# Altium PCB main.PcbDoc (part 2 of 2)
Units mm, origin at the board's own origin, x right, y up, seen from the top; angles counter-clockwise.
Board outline 136 x 119 mm, 2 copper layers (Top Layer, Bottom Layer); 167 components, 134 nets, 513 pads, 251 vias.
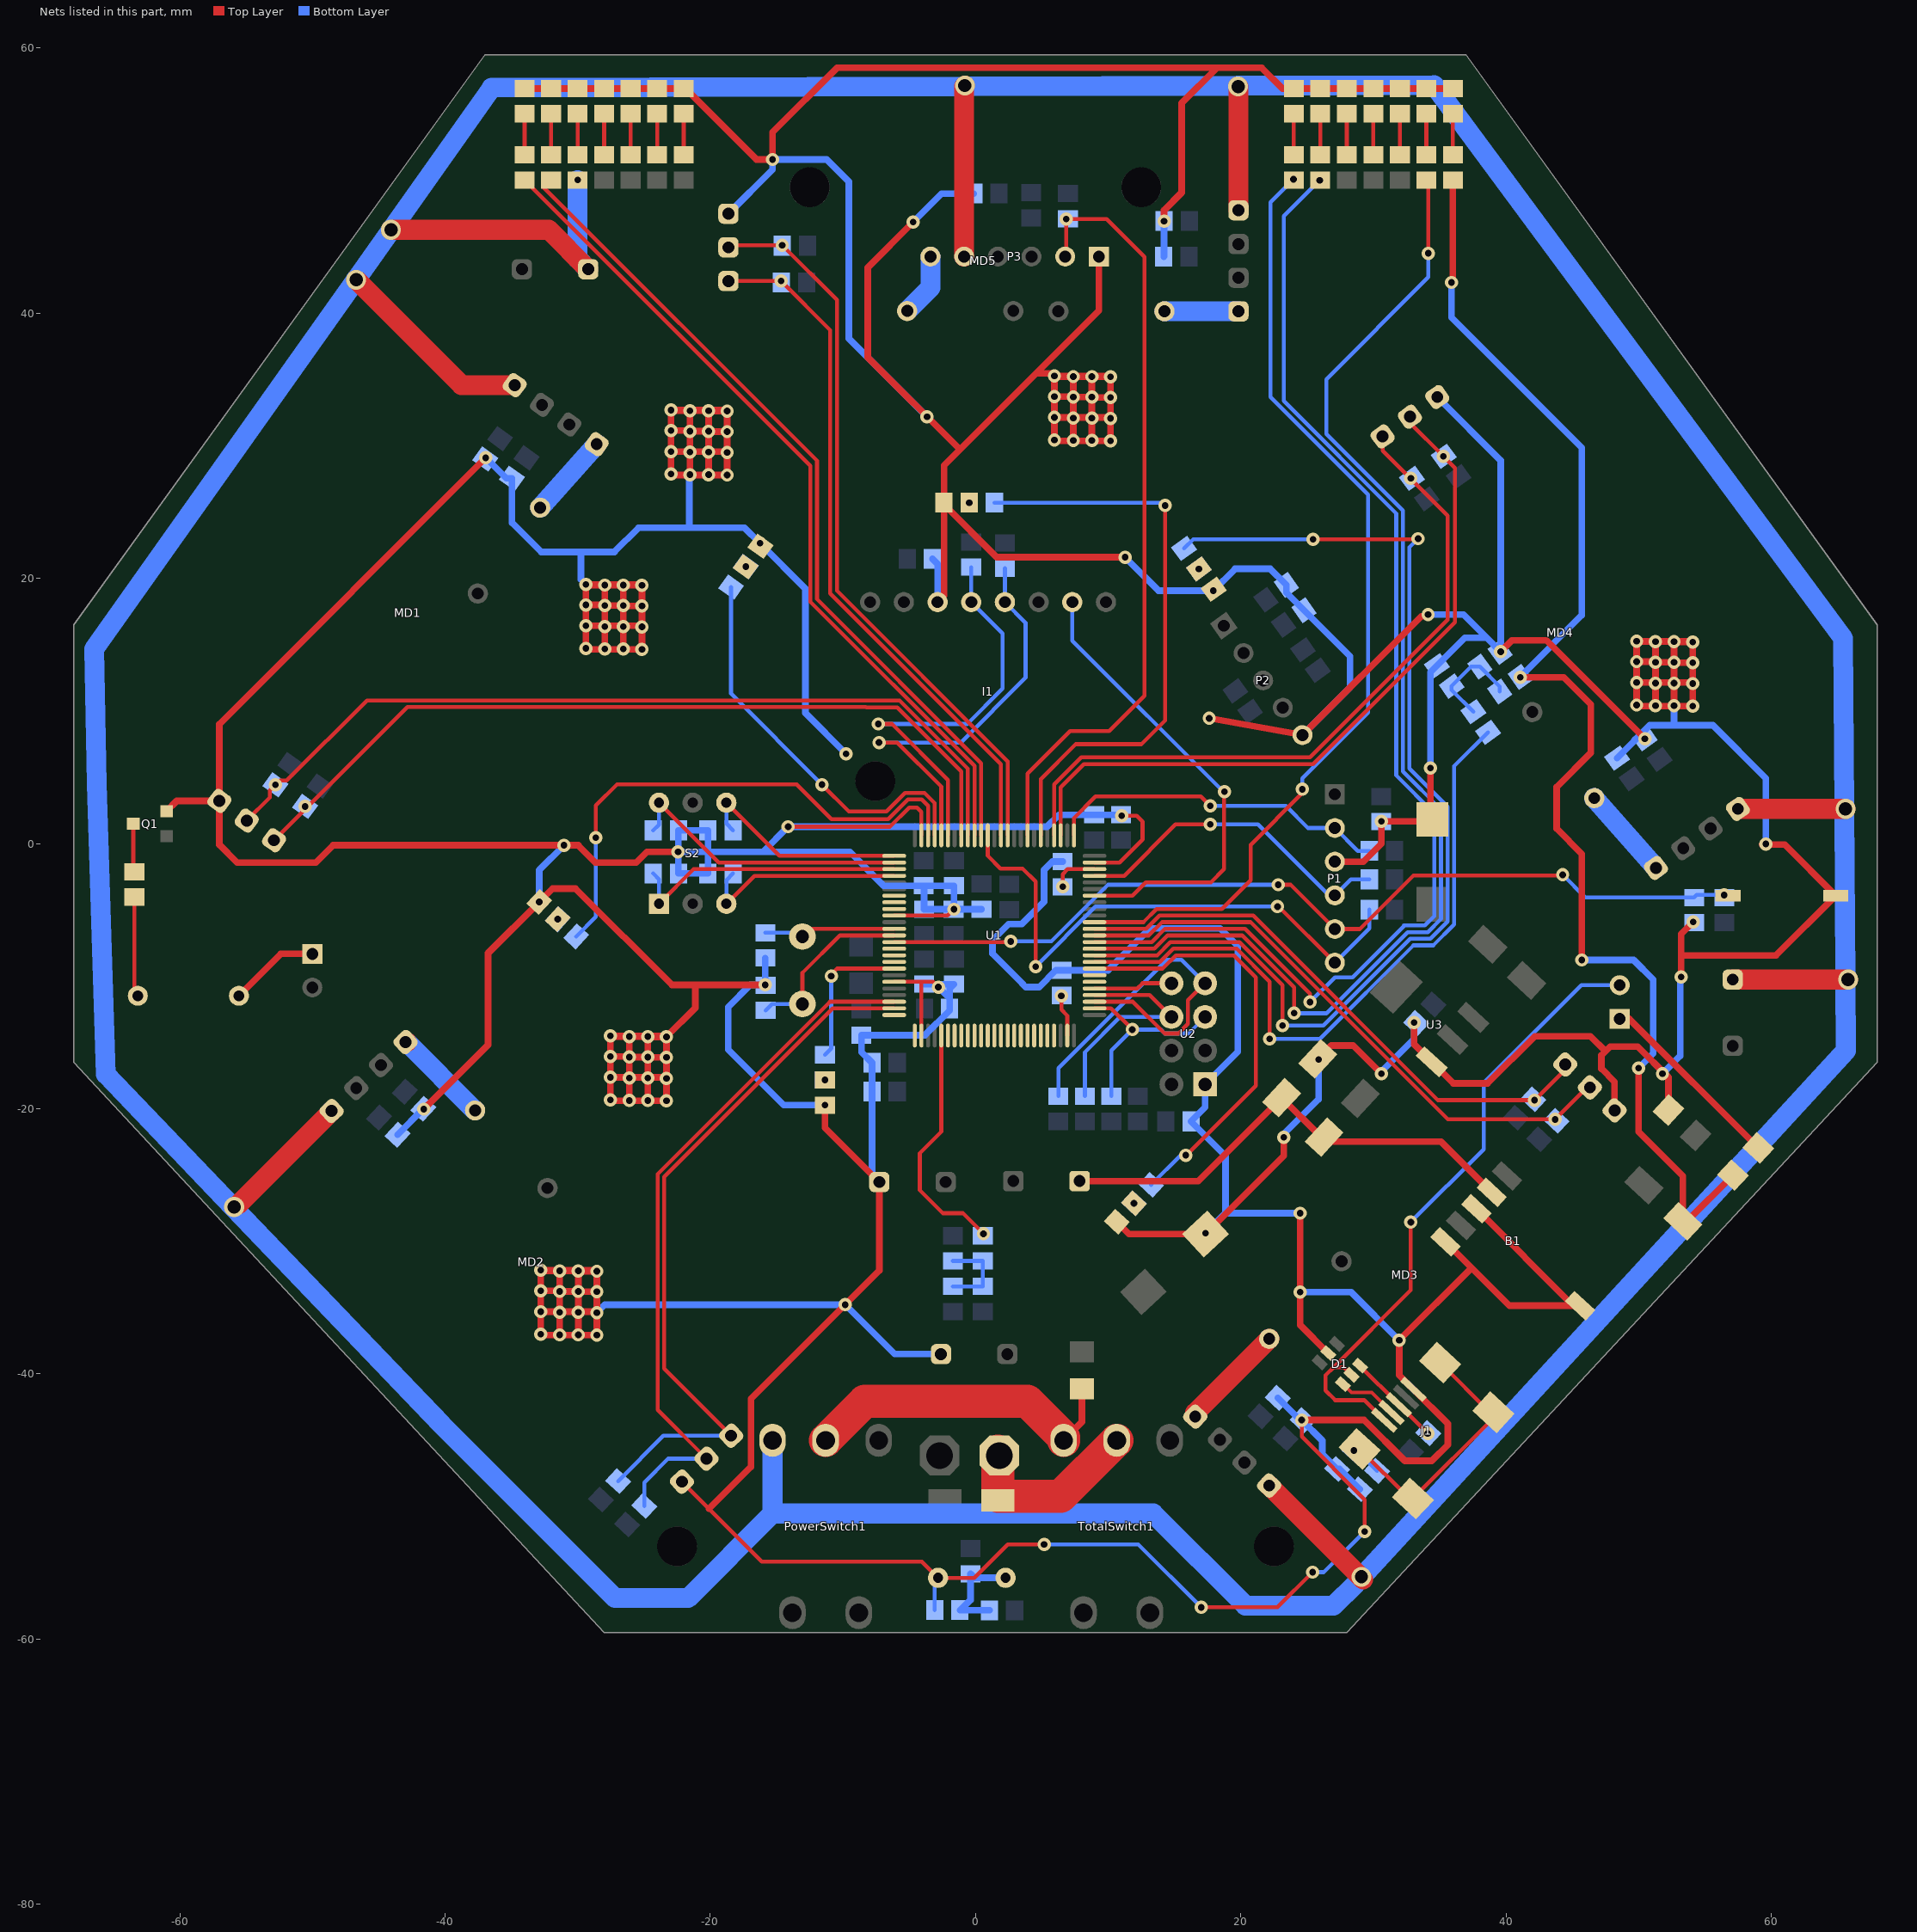
[diagram p2: the nets of this part, all layers, seen from the top]

## Via types
v1: diameter 1, hole 0.5, Top Layer to Bottom Layer, 242 vias
v2: diameter 1.5, hole 1, Top Layer to Bottom Layer, 9 vias

## Nets (pads, with @x,y where several pads share a name; then routed paths per layer and width w, separated by ;. In a path a pad name is that pad's centre, name@x,y a point inside that pad or via, vN(x,y) a via of type N, cw(c..) or ccw(c..) an arc to the next point about the centre after c; other vN are vias at no path point) (continued)
GND: B1.3 B1.5 B1.6 C1.1 C2.1 C3.1 C4.1 C5.1 C6.1 C7.1 C8.1 C9.1 C10.1 C11.1 C12.1 C13.1 C14.1 C15.1 C17.1 C18.2 C19.2 C20.1 C21.1 C22.1 C24.1 C25.1 C26.1 C27.1 C29.1 C31.1 C32.1 C33.1 C34.1 C35.1 C36.1 C37.1 C38.1 C39.- C40.- C42.2 C43.1 C44.2 C46.1 C47.1 D1.2 D5.1 D7.2 D8.2 D9.2 D10.2 FB2.1 I1.2 J1.5 LED1.2 LED2.2 LED3.2 LED4.2 LED5.2 LED6.2 LED7.2 LED8.2 LED9.2 LED10.2 LED11.2 LED12.2 LED13.2 LED14.2 LED15.2 LED16.2 MD1.6 MD2.6 MD3.6 MD4.6 MD5.6 P1.3 P2.5 P3.1 Q1.3 R4.2 R7.1 R8.1 R9.1 R10.1 R21.2 R22.1 S1.2 S3.2 U1.10 U1.20 U1.27 U1.74 U1.99 U2.1 U3.1 | length 1296.1
  Top Layer w0.3: MD2.6@-22.137,-48.12 -20.091,-50.166 -16.107,-54.15 -4.04,-54.15 S3.2@-2.815,-55.375 -0.1,-55.375 2.425,-52.85 v1(5.175,-52.85) ; v1(-14.125,1.275) -6.443,1.275 -4.993,2.725 -4.4,2.725 -4.075,2.4 U1.99@-4.075,0.625 ; U1.20@-6.125,-10.425 -4.075,-10.425 ; U1.10@-6.125,-5.425 -2.1,-5.425 v1(-1.625,-4.95) ; U1.27@-4.075,-14.475 -4.075,-10.425 ; v1(-2.8,-10.825) -3.2,-10.425 -4.075,-10.425 ; U1.74@8.975,-1.425 10.85,-1.425 12.6,0.325 12.6,1.65 12.15,2.1 v1(11.025,2.1) ; v1(17.025,-57.6) 22.775,-57.6 v1(25.425,-54.95) ; v1(24.6,-43.475) 24.6,-44.725 29.35,-49.475 v1(29.35,-51.875)
  Top Layer w0.5: Q1.3@-61,2.45 -60.228,3.222 MD1.6@-57.013,3.222 ; v1@-41.7,-20.125 v1(-41.6,-20.025) -36.75,-15.175 -36.75,-8.257 v1(-32.895,-4.402) -31.893,-3.4 -30.15,-3.4 -22.9,-10.65 -21.125,-10.65 ; v1(-36.925,29.1) -57.013,9.012 MD1.6@-57.013,3.222 ; LED11.2@-34,56.95 LED10.2@-32,56.95 D10.2@-30,56.95 LED2.2@-28,56.95 LED1.2@-26,56.95 LED8.2@-24,56.95 LED9.2@-22,56.95 -21.864,56.95 -16.514,51.6 v1(-15.3,51.6) -15.3,53.65 -10.425,58.525 18.225,58.525 ; v1(-22.425,-0.625) -24.775,-0.625 -25.575,-1.425 -28.65,-1.425 -29.95,-0.125 v1(-31.025,-0.125) -48.45,-0.125 -49.75,-1.425 -55.675,-1.425 -57.013,-0.087 MD1.6@-57.013,3.222 ; -20.091,-50.166 -16.925,-47 -16.925,-41.875 v1(-9.825,-34.775) -7.25,-32.2 C40.-@-7.25,-25.525 -11.35,-21.425 v1(-11.35,-19.725) ; v1(-15.85,-10.65) -21.125,-10.65 ; v1(-4.7,46.875) -8.125,43.45 -8.125,36.675 -1.175,29.725 ; I1.2@-2.86,18.215 -2.374,18.701 LED16.2@-2.374,25.578 ; P3.1@9.305,44.275 9.305,40.205 4.575,35.475 ; LED14.2@10.654,-28.515 11.582,-29.443 C42.2@17.34,-29.443 23.25,-23.533 v1(23.25,-22.15) ; v1(11.275,21.6) 1.604,21.6 LED16.2@-2.374,25.578 ; v1(14.225,46.95) 14.225,47.775 15.55,49.1 15.55,55.85 18.225,58.525 ; v1(17.625,9.45) P2.5@24.659,8.189 33.62,17.15 v1@34.3,17.15 ; v1(24.475,-27.875) v1(24.475,-33.825) 24.475,-36.307 D1.2@26.595,-38.427 ; v1(24.6,-43.475) 29.3,-43.475 32.375,-46.55 34.4,-46.55 35.625,-45.325 35.625,-43.764 J1.5@33.016,-41.155 31.95,-40.089 v1(31.95,-37.45) 37.4,-32 37.416,-32 ; D5.1@25.814,-16.237 26.826,-15.225 28.475,-15.225 v1(30.6,-17.35) ; P1.3@27.1,-1.36 29.24,-1.36 30.6,0 v1(30.6,1.675) C44.2@34.3,1.675 ; v1(33.075,-13.5) 33.075,-15.133 U3.1@34.402,-16.46 36.017,-18.075 38.625,-18.075 42.175,-14.525 46.375,-14.525 47.5,-15.65 ; v1(34.3,5.7) C44.2@34.3,1.675 ; C44.2@34.45,1.825 C44.2@34.3,1.675 ; B1.5@35.448,-30.032 37.416,-32 ; LED4.2@36,56.95 LED7.2@34,56.95 D9.2@32,56.95 D8.2@30,56.95 D7.2@28,56.95 LED5.2@26,56.95 LED6.2@24,56.95 23.15,56.95 21.575,58.525 18.225,58.525 ; B1.3@37.767,-27.546 B1.6@45.071,-34.85 ; v1(39.6,14.475) 40.45,15.325 43.05,15.325 v1(50.475,7.9) ; B1.6@45.6,-34.85 B1.6@45.071,-34.85 ; MD3.6@48.189,-20.12 48.189,-17.964 47.2,-16.975 47.2,-15.95 47.5,-15.65 ; FB2.1@52.251,-20.095 52.251,-17.626 49.925,-15.3 47.85,-15.3 47.5,-15.65 ; v1(53.2,-10.05) 53.2,-8.437 ; v1(54.125,-5.9) 53.2,-6.825 53.2,-8.437 ; v1@59.325,-0.075 61.014,-0.075 S1.2@64.864,-3.925 60.352,-8.437 53.2,-8.437 ; v1(-32.775,-35.3) v1(-32.775,-33.725) ; v1(-32.775,-35.3) v1(-32.775,-37) -32.7,-37.075 v1@-31.15,-37.075 ; v1(-32.775,-35.3) v1@-31.35,-35.3 ; v1(-32.775,-33.725) -31.4,-33.725 v1(-31.35,-33.775) ; v1(-32.775,-33.725) v1@-32.775,-32.275 ; v1@-32.775,-32.275 v1@-32.725,-32.225 ; v1@-32.775,-32.275 v1(-32.775,-32.175) ; v1(-32.775,-32.175) -28.625,-32.175 v1(-28.55,-32.25) ; v1(-32.775,-32.175) v1@-32.725,-32.225 ; v1@-32.725,-32.225 v1(-31.35,-32.225) ; v1@-31.35,-35.3 v1(-31.35,-33.775) ; v1@-31.35,-35.3 v1(-31.35,-35.35) -31.35,-36.875 v1@-31.15,-37.075 ; v1@-31.35,-35.3 v1@-29.95,-35.3 ; v1(-31.35,-33.775) v1(-29.95,-33.775) ; v1(-31.35,-33.775) v1(-31.35,-32.225) ; v1(-31.35,-32.225) v1(-29.95,-32.225) ; v1@-31.15,-37.075 v1@-29.925,-37.075 ; v1@-29.95,-35.3 v1(-29.95,-35.35) v1(-29.95,-37.05) v1@-29.925,-37.075 ; v1@-29.95,-35.3 v1(-29.95,-33.775) ; v1@-29.95,-35.3 -28.625,-35.3 v1(-28.55,-35.375) ; v1(-29.95,-33.775) -29.925,-33.8 v1(-28.55,-33.8) ; v1(-29.95,-33.775) v1(-29.95,-32.225) ; v1(-29.95,-32.225) -29.925,-32.25 v1(-28.55,-32.25) ; v1@-29.925,-37.075 v1(-28.55,-37.075) v1(-28.55,-35.375) ; v1(-29.375,16.425) v1(-29.375,18) ; v1(-29.375,16.425) v1(-29.375,14.725) -29.3,14.65 v1@-27.75,14.65 ; v1(-29.375,16.425) v1@-27.95,16.425 ; v1(-29.375,18) -28,18 v1(-27.95,17.95) ; v1(-29.375,18) v1@-29.375,19.45 ; v1@-29.375,19.45 v1@-29.325,19.5 ; v1@-29.375,19.45 v1(-29.375,19.55) ; v1(-29.375,19.55) -25.225,19.55 v1(-25.15,19.475) ; v1(-29.375,19.55) v1@-29.325,19.5 ; v1@-29.325,19.5 v1(-27.95,19.5) ; v1(-28.55,-35.375) v1(-28.55,-33.8) ; v1(-28.55,-33.8) v1(-28.55,-32.25) ; v1@-27.95,16.425 v1(-27.95,17.95) ; v1@-27.95,16.425 v1(-27.95,16.375) -27.95,14.85 v1@-27.75,14.65 ; v1@-27.95,16.425 v1@-26.55,16.425 ; v1(-27.95,17.95) v1(-26.55,17.95) ; v1(-27.95,17.95) v1(-27.95,19.5) ; v1(-27.95,19.5) v1(-26.55,19.5) ; v1@-27.75,14.65 v1@-26.525,14.65 ; v1(-27.525,-17.625) v1@-26.1,-17.625 ; v1(-27.525,-17.625) v1(-27.525,-19.325) -27.45,-19.4 v1@-25.9,-19.4 ; v1(-27.525,-17.625) v1(-27.525,-16.05) ; v1(-27.525,-16.05) v1@-27.525,-14.6 ; v1(-27.525,-16.05) -26.15,-16.05 v1(-26.1,-16.1) ; v1@-27.525,-14.6 v1(-27.525,-14.5) ; v1@-27.525,-14.6 v1@-27.475,-14.55 ; v1(-27.525,-14.5) -23.375,-14.5 v1(-23.3,-14.575) ; v1(-27.525,-14.5) v1@-27.475,-14.55 ; v1@-27.475,-14.55 v1(-26.1,-14.55) ; v1@-26.55,16.425 v1(-26.55,16.375) v1(-26.55,14.675) v1@-26.525,14.65 ; v1@-26.55,16.425 v1(-26.55,17.95) ; v1@-26.55,16.425 -25.225,16.425 v1(-25.15,16.35) ; v1(-26.55,17.95) -26.525,17.925 v1(-25.15,17.925) ; v1(-26.55,17.95) v1(-26.55,19.5) ; v1(-26.55,19.5) -26.525,19.475 v1(-25.15,19.475) ; v1@-26.525,14.65 v1(-25.15,14.65) v1(-25.15,16.35) ; v1@-26.1,-17.625 v1@-24.7,-17.625 ; v1@-26.1,-17.625 v1(-26.1,-17.675) -26.1,-19.2 v1@-25.9,-19.4 ; v1@-26.1,-17.625 v1(-26.1,-16.1) ; v1(-26.1,-16.1) v1(-26.1,-14.55) ; v1(-26.1,-16.1) v1(-24.7,-16.1) ; v1(-26.1,-14.55) v1(-24.7,-14.55) ; v1@-25.9,-19.4 v1@-24.675,-19.4 ; v1(-25.15,16.35) v1(-25.15,17.925) ; v1(-25.15,17.925) v1(-25.15,19.475) ; v1@-24.7,-17.625 -23.375,-17.625 v1(-23.3,-17.7) ; v1@-24.7,-17.625 v1(-24.7,-16.1) ; v1@-24.7,-17.625 v1(-24.7,-17.675) v1(-24.7,-19.375) v1@-24.675,-19.4 ; v1(-24.7,-16.1) v1(-24.7,-14.55) ; v1(-24.7,-16.1) -24.675,-16.125 v1(-23.3,-16.125) ; v1(-24.7,-14.55) -24.675,-14.575 v1(-23.3,-14.575) ; v1@-24.675,-19.4 v1(-23.3,-19.4) v1(-23.3,-17.7) ; v1(-23.3,-17.7) v1(-23.3,-16.125) ; v1(-23.3,-16.125) v1(-23.3,-14.575) ; v1(-23.3,-14.575) -21.125,-12.4 -21.125,-10.65 ; v1(-22.95,29.575) v1(-22.95,31.15) ; v1(-22.95,29.575) v1(-22.95,27.875) -22.875,27.8 v1@-21.325,27.8 ; v1(-22.95,29.575) v1@-21.525,29.575 ; v1(-22.95,31.15) -21.575,31.15 v1(-21.525,31.1) ; v1(-22.95,31.15) v1@-22.95,32.6 ; v1@-22.95,32.6 v1@-22.9,32.65 ; v1@-22.95,32.6 v1(-22.95,32.7) ; v1(-22.95,32.7) -18.8,32.7 v1(-18.725,32.625) ; v1(-22.95,32.7) v1@-22.9,32.65 ; v1@-22.9,32.65 v1(-21.525,32.65) ; v1@-21.525,29.575 v1(-21.525,31.1) ; v1@-21.525,29.575 v1(-21.525,29.525) -21.525,28 v1@-21.325,27.8 ; v1@-21.525,29.575 v1@-20.125,29.575 ; v1(-21.525,31.1) v1(-20.125,31.1) ; v1(-21.525,31.1) v1(-21.525,32.65) ; v1(-21.525,32.65) v1(-20.125,32.65) ; v1@-21.325,27.8 v1@-20.1,27.8 ; v1@-20.125,29.575 v1(-20.125,29.525) v1(-20.125,27.825) v1@-20.1,27.8 ; v1@-20.125,29.575 v1(-20.125,31.1) ; v1@-20.125,29.575 -18.8,29.575 v1(-18.725,29.5) ; v1(-20.125,31.1) -20.1,31.075 v1(-18.725,31.075) ; v1(-20.125,31.1) v1(-20.125,32.65) ; v1(-20.125,32.65) -20.1,32.625 v1(-18.725,32.625) ; v1@-20.1,27.8 v1(-18.725,27.8) v1(-18.725,29.5) ; v1(-18.725,29.5) v1(-18.725,31.075) ; v1(-18.725,31.075) v1(-18.725,32.625) ; LED16.2@-2.374,25.578 LED16.2@-2.374,25.714 -2.374,28.526 -1.175,29.725 ; -1.175,29.725 4.575,35.475 ; 4.575,35.475 5.75,35.475 v1(5.95,35.275) ; v1(5.95,32.15) v1(5.95,33.725) ; v1(5.95,32.15) v1(5.95,30.45) 6.025,30.375 v1@7.575,30.375 ; v1(5.95,32.15) v1@7.375,32.15 ; v1(5.95,33.725) 7.325,33.725 v1(7.375,33.675) ; v1(5.95,33.725) v1@5.95,35.175 ; v1@5.95,35.175 v1@6,35.225 ; v1@5.95,35.175 v1(5.95,35.275) ; v1(5.95,35.275) 10.1,35.275 v1(10.175,35.2) ; v1(5.95,35.275) v1@6,35.225 ; v1@6,35.225 v1(7.375,35.225) ; v1@7.375,32.15 v1(7.375,33.675) ; v1@7.375,32.15 v1(7.375,32.1) 7.375,30.575 v1@7.575,30.375 ; v1@7.375,32.15 v1@8.775,32.15 ; v1(7.375,33.675) v1(8.775,33.675) ; v1(7.375,33.675) v1(7.375,35.225) ; v1(7.375,35.225) v1(8.775,35.225) ; v1@7.575,30.375 v1@8.8,30.375 ; v1@8.775,32.15 v1(8.775,32.1) v1(8.775,30.4) v1@8.8,30.375 ; v1@8.775,32.15 v1(8.775,33.675) ; v1@8.775,32.15 10.1,32.15 v1(10.175,32.075) ; v1(8.775,33.675) 8.8,33.65 v1(10.175,33.65) ; v1(8.775,33.675) v1(8.775,35.225) ; v1(8.775,35.225) 8.8,35.2 v1(10.175,35.2) ; v1@8.8,30.375 v1(10.175,30.375) v1(10.175,32.075) ; v1(10.175,32.075) v1(10.175,33.65) ; v1(10.175,33.65) v1(10.175,35.2) ; 37.416,-32 40.266,-34.85 B1.6@45.071,-34.85 ; v1(49.85,12.15) v1(49.85,13.725) ; v1(49.85,12.15) v1(49.85,10.45) 49.925,10.375 v1@51.475,10.375 ; v1(49.85,12.15) v1@51.275,12.15 ; v1(49.85,13.725) 51.225,13.725 v1(51.275,13.675) ; v1(49.85,13.725) v1@49.85,15.175 ; v1@49.85,15.175 v1@49.9,15.225 ; v1@49.85,15.175 v1(49.85,15.275) ; v1(49.85,15.275) 54,15.275 v1(54.075,15.2) ; v1(49.85,15.275) v1@49.9,15.225 ; v1@49.9,15.225 v1(51.275,15.225) ; v1@51.275,12.15 v1(51.275,13.675) ; v1@51.275,12.15 v1(51.275,12.1) 51.275,10.575 v1@51.475,10.375 ; v1@51.275,12.15 v1@52.675,12.15 ; v1(51.275,13.675) v1(52.675,13.675) ; v1(51.275,13.675) v1(51.275,15.225) ; v1(51.275,15.225) v1(52.675,15.225) ; v1@51.475,10.375 v1@52.7,10.375 ; v1@52.675,12.15 v1(52.675,12.1) v1(52.675,10.4) v1@52.7,10.375 ; v1@52.675,12.15 v1(52.675,13.675) ; v1@52.675,12.15 54,12.15 v1(54.075,12.075) ; v1(52.675,13.675) 52.7,13.65 v1(54.075,13.65) ; v1(52.675,13.675) v1(52.675,15.225) ; v1(52.675,15.225) 52.7,15.2 v1(54.075,15.2) ; v1@52.7,10.375 v1(54.075,10.375) v1(54.075,12.075) ; v1(54.075,12.075) v1(54.075,13.65) ; v1(54.075,13.65) v1(54.075,15.2)
  Bottom Layer w0.3: C25.1@-3.075,-57.8 -3.075,-55.635 S3.2@-2.815,-55.375 ; v1(5.175,-52.85) 12.275,-52.85 v1(17.025,-57.6) ; v1(25.425,-54.95) 26.275,-54.95 v1(29.35,-51.875)
  Bottom Layer w0.5: C34.1@-43.58,-21.948 -41.657,-20.025 v1(-41.6,-20.025) ; v1(-36.925,29.1) -35.379,27.554 C31.1@-34.955,27.554 -34.955,24.205 -32.75,22 -29.75,22 ; v1(-32.895,-4.402) -32.895,-1.995 v1(-31.025,-0.125) ; v1(-29.375,19.55) -29.75,19.925 -29.75,22 ; v1(-28.55,-35.375) -27.95,-34.775 v1(-9.825,-34.775) -6.1,-38.5 C39.-@-2.6,-38.5 ; v1(-22.425,-0.625) v1@-22.4,-0.625 ; v1(-21.525,27.825) -21.575,27.775 -21.575,23.825 ; MD5.6@-18.628,47.51 -15.3,50.838 v1(-15.3,51.6) -11.225,51.6 -9.55,49.925 -9.55,38.1 v1(-3.65,32.2) ; C18.2@-15.85,-8.625 v1(-15.85,-10.65) ; C19.2@-15.825,-10.675 v1(-15.85,-10.65) ; v1(-11.35,-19.725) -14.45,-19.725 -18.65,-15.525 -18.65,-12.325 -16.975,-10.65 v1(-15.85,-10.65) ; v1(-9.75,6.775) -12.825,9.85 -12.825,19.225 v1(-16.25,22.65) -17.425,23.825 -21.575,23.825 ; C40.-@-7.25,-25.525 -7.8,-24.975 C9.1@-7.8,-18.7 C11.1@-7.8,-16.525 -8.6,-15.725 C3.1@-8.6,-14.45 -3.814,-14.45 -1.95,-12.586 C4.1@-1.95,-12.45 -1.95,-11.675 ; v1(-4.7,46.875) -2.55,49.025 C29.1@-0.125,49.025 ; C5.1@-3.875,-10.6 C12.1@-1.625,-10.6 -1.95,-10.925 -1.95,-11.675 ; C24.1@-3.25,21.475 -2.86,21.085 I1.2@-2.86,18.215 ; v1(-2.8,-10.825) -1.95,-11.675 ; R4.2@0.45,-4.95 C10.1@-1.65,-4.95 ; C14.1@6.575,-1.35 5.8,-1.35 5.175,-1.975 5.175,-4.386 3.486,-6.075 2.5,-6.075 1.275,-7.3 1.275,-8.285 3.5,-10.51 3.5,-10.525 3.8,-10.825 4.8,-10.825 6.075,-9.55 C13.1@6.5,-9.55 10,-9.55 13.15,-6.4 18.45,-6.4 19.775,-7.725 19.775,-15.69 U2.1@17.315,-18.15 17.315,-19.885 C20.1@16.25,-20.95 18.85,-23.55 18.85,-27.875 ; C7.1@10.975,2.175 C6.1@8.95,2.175 6.3,2.175 5.4,1.275 v1(-14.125,1.275) -16.025,-0.625 ; v1(11.275,21.6) 13.8,19.075 v1(17.925,19.075) 19.575,20.725 22.226,20.725 C27.1@23.446,19.505 23.446,18.929 C26.1@24.775,17.6 28.25,14.125 28.25,11.78 P2.5@24.659,8.189 ; C46.1@14.2,44.275 14.225,44.3 v1(14.225,46.95) ; v1(17.35,-29.375) 18.85,-27.875 ; C35.1@22.798,-41.805 24.468,-43.475 v1(24.6,-43.475) 26.15,-45.025 26.15,-46.043 R22.1@27.277,-47.17 27.452,-47.17 C22.1@28.977,-48.695 ; v1(23.25,-22.15) 23.25,-21.9 25.875,-19.275 v1(25.875,-16.275) ; v1(24.475,-33.825) 28.325,-33.825 v1(31.95,-37.45) v1@32.025,-37.525 ; v1(24.475,-27.875) 18.85,-27.875 ; v1(30.6,-17.35) 30.6,-17.2 33.075,-14.725 v1(33.075,-13.5) ; v1(34.125,17.275) 36.8,17.275 38.55,15.525 ; v1(34.3,5.7) 34.3,12.926 R21.2@34.795,13.421 36.899,15.525 38.55,15.525 ; MD4.6@34.82,33.681 39.6,28.902 v1(39.6,14.475) 38.55,15.525 ; C37.1@48.37,6.446 50.849,8.925 52.625,8.925 ; v1(51.8,-17.35) 53.15,-16 53.15,-10.1 v1(53.2,-10.05) ; v1(52.675,10.4) 52.675,8.975 52.625,8.925 ; v1(59.6,-0.025) 59.6,4.925 55.6,8.925 52.625,8.925 ; -29.75,22 -27.225,22 -25.4,23.825 -21.575,23.825 ; v1@-22.4,-0.625 -20.175,-0.625 ; v1@-22.4,-0.625 R10.1@-22.4,-2.25 R8.1@-20.175,-2.25 -20.175,-0.625 ; v1@-22.4,-0.625 R7.1@-22.4,1 R9.1@-20.175,1 -20.175,-0.625 ; -20.175,-0.625 -16.025,-0.625 ; -16.025,-0.625 -9.475,-0.625 -6.925,-3.175 C1.1@-3.9,-3.175 ; C1.1@-3.9,-3.175 -3.875,-3.2 C2.1@-3.875,-4.95 C10.1@-1.65,-4.95 ; C1.1@-3.9,-3.175 C8.1@-1.625,-3.175 -1.625,-4.925 C10.1@-1.65,-4.95
  other v1: -31.35,-37.05 -26.1,-19.375 51.275,10.4 -27.95,14.675 7.375,30.4
HEX0: R10.2 S2.1 U1.3 | length 21.3
  Top Layer w0.3: S2.1@-23.865,-4.535 -21.255,-1.925 U1.3@-6.125,-1.925
  Bottom Layer w0.3: R10.2@-24.3,-2.25 -23.865,-2.685 S2.1@-23.865,-4.535
HEX1: R9.2 S2.4 U1.1 | length 16.6
  Top Layer w0.3: S2.4@-18.785,3.085 -14.775,-0.925 U1.1@-6.125,-0.925
  Bottom Layer w0.3: S2.4@-18.785,3.085 -18.785,1.51 R9.2@-18.275,1
HEX2: R8.2 S2.3 U1.4 | length 16
  Top Layer w0.3: S2.3@-18.785,-4.535 -16.675,-2.425 U1.4@-6.125,-2.425
  Bottom Layer w0.3: S2.3@-18.785,-4.535 -18.785,-2.76 R8.2@-18.275,-2.25
HEX3: R7.2 S2.6 U1.2 | length 21.9
  Top Layer w0.3: S2.6@-23.865,3.085 -19.355,-1.425 U1.2@-6.125,-1.425
  Bottom Layer w0.3: R7.2@-24.3,1 -23.865,1.435 S2.6@-23.865,3.085
IMUOK: R28.1 U1.61 | length 95.8
  Top Layer w0.3: U1.61@8.975,-7.925 13.491,-7.925 14.491,-6.925 20.111,-6.925 24.025,-10.839 v1(24.025,-12.775) ; R28.1@34,50.05 33.8,49.85 34.15,49.5 v1(34.15,44.525)
  Bottom Layer w0.3: v1(24.025,-12.775) 24.05,-12.8 26.45,-12.8 32.575,-6.675 34.102,-6.675 35.1,-5.677 35.1,2.575 32.225,5.45 32.225,25.114 26.45,30.889 26.45,35.025 34.15,42.725 v1(34.15,44.525)
IMUSCL: I1.3 R27.1 U1.95 | length 31.8
  Top Layer w0.3: v1(-7.325,9.025) -6.3,9.025 -2.075,4.8 U1.95@-2.075,0.625
  Bottom Layer w0.3: v1(-7.325,9.025) -0.625,9.025 2.05,11.7 2.05,15.845 I1.3@-0.32,18.215 -0.325,18.22 R27.1@-0.325,20.85
IMUSDA: I1.4 R26.1 U1.96 | length 31.8
  Top Layer w0.3: v1(-7.275,7.625) -5.9,7.625 -2.575,4.3 U1.96@-2.575,0.625
  Bottom Layer w0.3: v1(-7.275,7.625) -1.125,7.625 -1.112,7.612 3.775,12.5 3.775,16.66 I1.4@2.22,18.215 2.225,18.22 R26.1@2.225,20.775
INTA: I1.6 U1.69 | length 35.8
  Top Layer w0.3: U1.69@8.975,-3.925 11.834,-3.925 12.834,-2.925 17.75,-2.925 18.75,-1.925 18.75,3.9 v1(18.775,3.925)
  Bottom Layer w0.3: I1.6@7.3,18.215 7.3,15.3 18.7,3.9 v1@18.7,3.6
IRQ: U1.55 U2.8 | length 6
  Top Layer w0.3: U1.55@8.975,-10.925 12.2,-10.925 12.595,-10.53 U2.8@14.775,-10.53
M1GND: F3.0 MD1.0 | length 6.4
  Bottom Layer w1.5: F3.0@-32.824,25.336 MD1.0@-28.564,30.126
M2GND: F4.0 MD2.0 | length 7.5
  Top Layer w1.5: MD2.0@-42.974,-14.969 MD2.0@-42.884,-14.969
  Bottom Layer w1.5: MD2.0@-42.974,-14.969 -42.884,-14.969 F4.0@-37.728,-20.125
M3GND: F5.0 MD3.0 | length 8.2
  Top Layer w1.5: MD3.0@16.572,-43.219 16.572,-42.926 F5.0@22.147,-37.35
M4GND: F6.0 MD4.0 | length 7
  Bottom Layer w1.5: F6.0@46.662,3.429 MD4.0@51.307,-1.834
MD1: R41.1 U1.97 | length 30.4
  Top Layer w0.3: v1(-11.575,4.45) -9.55,2.425 -6.707,2.425 -5.307,3.825 -3.843,3.825 -3.075,3.057 U1.97@-3.075,0.625
  Bottom Layer w0.3: R41.1@-18.43,19.354 -18.43,11.305 v1(-11.575,4.45)
MD2: R44.1 U1.98 | length 40.3
  Top Layer w0.3: v1(-28.625,0.45) -28.625,2.875 -27.025,4.475 -13.475,4.475 -10.85,1.85 -6.575,1.85 -5.1,3.325 -4.05,3.325 -3.575,2.85 U1.98@-3.575,0.625
  Bottom Layer w0.3: R44.1@-30.105,-6.998 -28.625,-5.518 v1(-28.625,0.45)
MD3: R47.1 U1.58 | length 32.4
  Top Layer w0.3: U1.58@8.975,-9.425 14.112,-9.425 15.112,-8.425 19.489,-8.425 21.15,-10.086 21.15,-18.25 v1@15.9,-23.5
  Bottom Layer w0.3: R47.1@13.248,-25.73 15.478,-23.5 v1(15.85,-23.5)
MD4: R50.1 U1.60 | length 83
  Top Layer w0.3: U1.60@8.975,-8.425 13.698,-8.425 14.698,-7.425 19.904,-7.425 23.15,-10.671 v1(23.15,-13.725) ; v1(25.45,22.95) 33.325,22.95 v1(33.375,23)
  Bottom Layer w0.3: R50.1@15.735,22.263 16.422,22.95 v1(25.45,22.95) ; v1(23.15,-13.725) 26.232,-13.725 32.782,-7.175 34.309,-7.175 35.6,-5.884 35.6,2.782 32.725,5.657 32.725,22.35 v1(33.375,23)
MDSPINN: R60.1 U1.81 | length 44.6
  Top Layer w0.3: U1.81@4.925,0.625 4.925,4.871 7.554,7.5 12.518,7.5 14.3,9.282 v1(14.3,25.5)
  Bottom Layer w0.3: R60.1@1.426,25.714 14.086,25.714 v1(14.3,25.5)
MISO: R12.1 U1.53 U2.7 | length 29.3
  Top Layer w0.3: U1.53@8.975,-11.925 11.862,-11.925 14.257,-14.32 15.293,-14.32 16.025,-13.588 16.025,-11.82 U2.7@17.315,-10.53
  Bottom Layer w0.3: R12.1@6.25,-19.05 6.25,-16.925 14.425,-8.75 15.535,-8.75 U2.7@17.315,-10.53
MOSI: R13.1 U1.54 U2.6 | length 17.4
  Top Layer w0.3: U1.54@8.975,-11.425 13.13,-11.425 U2.6@14.775,-13.07
  Bottom Layer w0.3: R13.1@8.25,-19.05 8.25,-15.725 10.905,-13.07 U2.6@14.775,-13.07
MOTOR1RX: MD1.4 R40.1 U1.93 | length 62.8
  Top Layer w0.3: MD1.4@-52.89,0.254 -42.844,10.3 -8.261,10.3 -8.236,10.275 -5.903,10.275 -1.075,5.447 U1.93@-1.075,0.625
  other v1: -50.555,2.804
MOTOR1TX: MD1.5 R39.1 U1.92 | length 65.6
  Top Layer w0.3: MD1.5@-54.952,1.738 -53.207,3.482 -53.207,4.002 v1(-52.78,4.429) -52.452,4.757 -51.932,4.757 -45.889,10.8 -5.721,10.8 -0.575,5.654 U1.92@-0.575,0.625
MOTOR2RX: MD2.4 R43.1 U1.24 | length 54.2
  Top Layer w0.3: MD2.4@-18.422,-44.656 -23.471,-39.606 -23.471,-25.128 -10.769,-12.425 U1.24@-6.125,-12.425
  Bottom Layer w0.3: R43.1@-26.952,-48.08 -23.527,-44.656 MD2.4@-18.422,-44.656
MOTOR2TX: MD2.5 R42.1 U1.23 | length 53.4
  Top Layer w0.3: MD2.5@-20.279,-46.388 -23.971,-42.696 -23.971,-24.921 -10.976,-11.925 U1.23@-6.125,-11.925
  Bottom Layer w0.3: R42.1@-24.977,-49.955 -24.977,-48.177 -23.188,-46.388 MD2.5@-20.279,-46.388
MOTOR3RX: MD3.4 R46.1 U1.64 | length 43
  Top Layer w0.3: U1.64@8.975,-6.425 12.87,-6.425 13.87,-5.425 20.95,-5.425 34.875,-19.35 v1(42.15,-19.35) 44.473,-17.027 MD3.4@44.473,-16.656
MOTOR3TX: MD3.5 R45.1 U1.63 | length 44.9
  Top Layer w0.3: U1.63@8.975,-6.925 13.077,-6.925 14.077,-5.925 20.743,-5.925 35.618,-20.8 v1(43.7,-20.8) 46.112,-18.388 MD3.5@46.331,-18.388
MOTOR4RX: MD4.4 R49.1 U1.79 | length 54.5
  Top Layer w0.3: U1.79@5.925,0.625 5.925,4.457 7.968,6.5 25.225,6.5 35.6,16.875 35.6,24.725 30.697,29.628 MD4.4@30.697,30.713
  other v1: 32.825,27.55
MOTOR4TX: MD4.5 R48.1 U1.78 | length 55.4
  Top Layer w0.3: U1.78@6.425,0.625 6.425,4.25 8.175,6 25.45,6 36.15,16.7 36.15,28.325 v1(35.275,29.2) 35.275,29.225 32.759,31.741 MD4.5@32.759,32.197
MSGND: F8.0 MD5.0 | length 5.6
  Bottom Layer w1.5: F8.0@14.25,40.15 19.818,40.15 MD5.0@19.828,40.14
NetB1_2: B1.2 D2.1 D5.2 I2.0 | length 36.6
  Top Layer w0.5: I2.0@7.85,-25.45 16.799,-25.45 D5.2@23.086,-19.163 26.061,-22.138 D2.1@26.286,-22.138 26.623,-22.475 35.099,-22.475 B1.2@38.927,-26.303
NetB2_+: B2.+ D3.2 TotalSwitch1.2 | length 14.1
  Top Layer w2.5: B2.+@1.7,-45.825 1.7,-49.2 1.725,-49.225 6.425,-49.225 TotalSwitch1.2@10.65,-45
NetC21_2: C21.2 R19.2 R20.2 R21.1 | length 7.8
  Bottom Layer w0.3: R19.2@37.545,9.946 35.905,11.586 R21.1@35.905,11.879 37.371,13.345 C21.2@38.029,13.345 39.529,11.845 R20.2@39.529,11.47
NetC22_2: C22.2 J1.6 J1.7 J1.8 J1.9 R22.2 | length 22.6
  Top Layer w0.3: J1.8@28.963,-45.648 32.714,-49.399 J1.9@32.986,-49.399 39.055,-43.329 J1.7@39.055,-42.89 38.784,-42.89 J1.6@35.033,-39.139
  Bottom Layer w0.3: v1(28.525,-45.775) 28.743,-45.775 C22.2@30.273,-47.305
NetC25_2: C25.2 R29.1 R30.2 S3.1 | length 8
  Bottom Layer w0.5: R30.2@1.05,-57.825 -1.15,-57.825 -0.375,-57.05 R29.1@-0.375,-55.075 -0.075,-55.375 S3.1@2.265,-55.375
NetC41_2: C41.2 R51.1 R52.2 R53.2 | length 6.4
  Bottom Layer w0.3: R53.2@-1.7,-33.4 R51.1@0.55,-33.4 R52.2@0.55,-31.475 C41.2@-1.7,-31.475
NetD1_4: D1.4 J1.2 | length 4.6
  Top Layer w0.254: D1.4@27.702,-40.758 28.344,-41.4 29.869,-41.4 J1.2@31.379,-42.91
NetD1_5: D1.5 J1.1 JumperUSB1.2 | length 48.4
  Top Layer w0.3: D1.5@28.35,-40.064 27.786,-39.5 27,-39.5 ; J1.1@30.834,-43.495 29.314,-41.975 27.125,-41.975 26.4,-41.25 26.4,-40.1 27,-39.5 ; v1(32.825,-28.55) 32.825,-33.675 27,-39.5
  Bottom Layer w0.3: v1(32.825,-28.55) 38.325,-23.05 38.325,-18.025 45.675,-10.675 JumperUSB1.2@48.575,-10.675
NetD1_6: D1.6 J1.3 R18.2 | length 7.2
  Top Layer w0.3: D1.6@28.998,-39.369 28.998,-39.398 J1.3@31.925,-42.325 v1(34.1,-44.5)
NetD7_1: D7.1 R54.1 | length 3.1
  Top Layer w0.3: R54.1@28,51.95 D7.1@28,55.05
NetD8_1: D8.1 R55.1 | length 3.1
  Top Layer w0.3: R55.1@30,51.95 D8.1@30,55.05
NetD9_1: D9.1 R56.1 | length 3.1
  Top Layer w0.3: R56.1@32,51.95 D9.1@32,55.05
NetD10_1: D10.1 R57.1 | length 3.1
  Top Layer w0.3: R57.1@-30,51.95 D10.1@-30,55.05
NetF1_1: F1.1 JumperUSB1.1 | length 14.5
  Top Layer w0.5: JumperUSB1.1@48.575,-13.215 49.297,-13.215 F1.1@59.035,-22.952
NetF7_2: F7.2 PowerSwitch1.2 TotalSwitch1.1 | length 25
  Top Layer w0.5: TotalSwitch1.1@6.65,-45 8.025,-43.625 F7.2@8.025,-41.125
  Top Layer w2.5: PowerSwitch1.2@-11.3,-45 -8.35,-42.05 3.925,-42.05 6.65,-44.775 TotalSwitch1.1@6.65,-45
NetJumper_BUZ1_1: Jumper_BUZ1.1 LS1.2 | length 6.9
  Top Layer w0.5: LS1.2@-55.54,-11.475 -52.375,-8.31 Jumper_BUZ1.1@-50,-8.31
NetLED1_1: LED1.1 R15.2 | length 3.1
  Top Layer w0.3: R15.2@-26,51.95 LED1.1@-26,55.05
NetLED2_1: LED2.1 R16.2 | length 3.1
  Top Layer w0.3: R16.2@-28,51.95 LED2.1@-28,55.05
NetLED3_1: LED3.1 R17.2
  other v1: -11.35,-17.825
NetLED4_1: LED4.1 R23.2 | length 3.1
  Top Layer w0.3: R23.2@36,51.95 LED4.1@36,55.05
NetLED5_1: LED5.1 R24.2 | length 3.1
  Top Layer w0.3: R24.2@26,51.95 LED5.1@26,55.05
NetLED6_1: LED6.1 R25.2 | length 3.1
  Top Layer w0.3: R25.2@24,51.95 LED6.1@24,55.05
NetLED7_1: LED7.1 R28.2 | length 3.1
  Top Layer w0.3: R28.2@34,51.95 LED7.1@34,55.05
NetLED8_1: LED8.1 R33.2 | length 3.1
  Top Layer w0.3: R33.2@-24,51.95 LED8.1@-24,55.05
NetLED9_1: LED9.1 R34.2 | length 3.1
  Top Layer w0.3: R34.2@-22,51.95 LED9.1@-22,55.05
NetLED10_1: LED10.1 R37.2 | length 3.1
  Top Layer w0.3: R37.2@-32,51.95 LED10.1@-32,55.05
NetLED11_1: LED11.1 R38.2 | length 3.1
  Top Layer w0.3: R38.2@-34,51.95 LED11.1@-34,55.05
NetLED12_1: LED12.1 R41.2
  other v1: -17.32,20.896
NetLED13_1: LED13.1 R44.2
  other v1: -31.495,-5.702
NetLED14_1: LED14.1 R47.2
  other v1: 11.95,-27.125
NetLED15_1: LED15.1 R50.2
  other v1: 16.845,20.721
NetLED16_1: LED16.1 R60.2
  other v1: -0.474,25.714
NetLS1_1: LS1.1 R6.2 | length 7.6
  Top Layer w0.3: R6.2@-63.425,-4.025 -63.425,-11.21 LS1.1@-63.16,-11.475
NetQ1_1: Q1.1 R6.1 | length 3.7
  Top Layer w0.3: Q1.1@-63.5,1.5 -63.5,-2.05 R6.1@-63.425,-2.125
NetU1_7: U1.7
NetU1_8: U1.8
NetU1_9: U1.9
NetU1_15: U1.15
NetU1_16: U1.16
NetU1_17: U1.17
NetU1_25: U1.25
NetU1_26: U1.26
NetU1_31: U1.31
NetU1_32: U1.32
NetU1_33: U1.33
NetU1_34: U1.34
NetU1_35: U1.35
NetU1_36: U1.36
NetU1_37: U1.37
NetU1_38: U1.38
NetU1_39: U1.39
NetU1_40: U1.40
NetU1_41: U1.41
NetU1_42: U1.42
NetU1_43: U1.43
NetU1_44: U1.44
NetU1_45: U1.45
NetU1_46: U1.46
NetU1_47: U1.47
NetU1_56: U1.56
NetU1_57: U1.57
NRFOK: R17.1 U1.18 | length 11
  Top Layer w0.3: v1@-10.875,-9.85 -10.45,-9.425 U1.18@-6.125,-9.425
  Bottom Layer w0.3: R17.1@-11.35,-15.925 -10.875,-15.45 v1(-10.875,-10)
NRFSCK: R11.1 U1.52 U2.5 | length 15.4
  Top Layer w0.3: U1.52@8.975,-12.425 10.225,-12.425 v1(11.825,-14.025) v1@11.825,-14.075
  Bottom Layer w0.3: R11.1@10.25,-19.05 10.25,-15.6 v1(11.825,-14.025) 13.962,-14.025 14.257,-14.32 16.065,-14.32 U2.5@17.315,-13.07
NRST: C17.2 P1.5 R5.2 S1.1 U1.14 | length 68.2
  Top Layer w0.3: U1.14@-6.125,-7.425 -5.168,-7.425 2.6,-7.425 v1(2.65,-7.375) ; v1(22.825,-3.1) 23.76,-3.1 P1.5@27.1,-6.44 28.985,-6.44 33.025,-2.4 v1@44.225,-2.4
  Bottom Layer w0.3: v1(2.65,-7.375) 5.725,-7.375 10,-3.1 v1(22.825,-3.1) ; v1(44.275,-2.35) 45.988,-4.063 C17.2@54.193,-4.063 54.381,-3.875 v1(56.45,-3.875)
OSC_IN: C18.1 U1.12 Y1.2 | length 10.1
  Top Layer w0.3: Y1.2@-13.05,-7.01 -12.465,-6.425 U1.12@-6.125,-6.425
  Bottom Layer w0.3: C18.1@-15.85,-6.725 -13.335,-6.725 Y1.2@-13.05,-7.01
OSC_OUT: C19.1 U1.13 Y1.1 | length 13.4
  Top Layer w0.3: Y1.1@-13.05,-12.09 -13.05,-9.75 -10.225,-6.925 U1.13@-6.125,-6.925
  Bottom Layer w0.3: C19.1@-15.825,-12.575 -15.34,-12.09 Y1.1@-13.05,-12.09
POWER: C23.+ C45.+ MD1.3 MD2.3 MD3.3 MD4.3 MD5.3 P3.5 PowerSwitch1.1 R57.2 | length 512.8
  Top Layer w1.5: v2@-55.648,-27.267 MD2.3@-48.547,-20.166 ; v2(-46.7,42.525) -38.753,34.578 MD1.3@-34.748,34.578 ; v2(-44.075,46.3) -32.175,46.3 C23.+@-29.2,43.325 ; P3.5@-0.855,44.275 -0.855,57.12 v2(-0.8,57.175) ; v2(19.8,57.1) 19.828,57.072 MD5.3@19.828,47.76 ; MD3.3@22.145,-48.416 v2@29.225,-55.496 ; C45.+@57.1,-10.25 v2(65.8,-10.25) ; MD4.3@57.491,2.618 v2(65.607,2.618)
  Bottom Layer w1.5: v1(-30,50.05) -30,44.125 C23.+@-29.2,43.325 ; PowerSwitch1.1@-15.3,-45 -15.3,-50.525 ; -15.3,-50.525 -21.675,-56.9 -27.175,-56.9 -40.262,-43.813 -55.946,-27.444 -65.561,-17.41 -65.573,-17.398 -66.25,4.5 -66.45,14.675 -46.719,42.538 -44.062,46.291 -36.477,57.002 -0.8,57.101 19.8,57.159 34.575,57.2 65.425,15.475 65.508,2.617 65.59,-10.251 65.625,-15.625 29.121,-55.319 28.685,-55.792 27.003,-57.475 20.35,-57.475 13.4,-50.525 -15.3,-50.525
  other v2: 29.1,-55.3 -55.9,-27.4
RX: P3.3 R35.1 U1.80 | length 66.3
  Top Layer w0.3: P3.3@4.375,44.275 P3.3@4.225,44.275 v1(4.225,47.25) 5.15,48.175 10.2,48.175 15.507,42.868 15.507,20.37 15.5,20.363 15.5,9.775 12.725,7 7.761,7 5.425,4.664 U1.80@5.425,0.625
RX: MD5.5 R58.1 U1.86 | length 55.7
  Top Layer w0.3: MD5.5@-18.628,44.97 -18.473,45.125 v1(-14.575,45.125) -10.45,41 -10.45,19.075 2.425,6.2 U1.86@2.425,0.625
SGND: F2.1 P3.6 | length 4.8
  Bottom Layer w1.5: F2.1@-5.15,40.175 -3.395,41.93 P3.6@-3.395,44.275
SHOOTISCHARGED: R38.1 U1.91 | length 63.5
  Top Layer w0.3: R38.1@-34,50.05 -12.45,28.5 -12.45,18.236 -0.075,5.861 U1.91@-0.075,0.625
SHOOTOK: R37.1 U1.90 | length 62.6
  Top Layer w0.3: R37.1@-32.587,49.512 -11.95,28.875 -11.95,18.443 0.425,6.068 U1.90@0.425,0.625
SHOOTRX: P3.2 R36.1 U1.83 | length 59
  Top Layer w0.3: U1.83@3.925,0.625 3.925,5.286 7.139,8.5 10.093,8.5 12.75,11.157 12.75,44.25 9.9,47.1 v1(6.85,47.1) 6.85,44.36 P3.2@6.765,44.275
SPINNRX: MD5.4 R59.1 U1.87 | length 52.6
  Top Layer w0.3: MD5.4@-18.628,42.43 v1(-14.655,42.43) -10.95,38.725 -10.95,18.868 1.925,5.993 U1.87@1.925,0.625
SWCLK: P1.2 R1.1 U1.76 | length 25.8
  Top Layer w0.3: U1.76@7.425,0.625 7.425,1.925 9.025,3.525 9.027,3.525 9.052,3.55 17,3.55 v1(17.7,2.85)
  Bottom Layer w0.3: v1@17.825,2.85 23.4,2.85 25.07,1.18 P1.2@27.1,1.18 28.83,-0.55 R1.1@29.7,-0.55
SWDIO: P1.4 R2.1 U1.72 | length 25
  Top Layer w0.3: U1.72@8.975,-2.425 11.213,-2.425 15.088,1.45 v1(17.7,1.45) ; P1.4@27.075,-3.925 P1.4@27.1,-3.9
  Bottom Layer w0.3: v1@17.35,1.45 v1@17.65,1.45 ; v1@18.125,1.45 21.3,1.45 26.65,-3.9 P1.4@27.1,-3.9 28.3,-2.7 R2.1@29.7,-2.7
SWO: P1.6 R3.1 U1.89 | length 43.4
  Top Layer w0.3: U1.89@0.925,0.625 0.925,-0.925 1.875,-1.875 3.55,-1.875 4.532,-2.857 v1(4.532,-9.275) ; v1@22.97,-4.85 P1.6@27.1,-8.98
  Bottom Layer w0.3: v1(4.532,-9.275) 9.057,-4.75 v1(22.775,-4.75) ; P1.6@27.1,-8.98 29.7,-6.38 R3.1@29.7,-4.975
USB5V: D4.1 F1.2 R20.1 R23.1 | length 102.2
  Top Layer w0.5: v1(35.9,42.325) 36,42.425 R23.1@36,50.05 ; v1(41.075,12.55) 44.35,12.55 46.4,10.5 46.4,6.85 43.825,4.275 43.825,1.125 45.725,-0.775 v1(45.725,-8.775) v1@45.725,-8.8 ; v1@50,-16.9 v1(50,-16.925) 50,-21.725 53.338,-25.063 D4.1@53.338,-28.489 53.636,-28.489 F1.2@57.125,-25
  Bottom Layer w0.5: v1(35.9,42.325) 35.9,39.675 45.725,29.85 45.725,17.234 R20.1@41.071,12.58 ; v1(45.725,-8.775) 49.625,-8.775 51.1,-10.25 51.1,-15.825 v1(50,-16.925)
USBENABLE: R19.1 U1.59 | length 52
  Top Layer w0.3: U1.59@8.975,-8.925 13.905,-8.925 14.905,-7.925 19.697,-7.925 22.175,-10.403 v1(22.175,-14.725)
  Bottom Layer w0.3: v1(22.175,-14.725) 25.975,-14.725 33.025,-7.675 34.516,-7.675 36.1,-6.091 36.1,5.849 R19.1@38.655,8.404
USBRECEIVE: R24.1 U1.62 | length 92.9
  Top Layer w0.3: U1.62@8.975,-7.425 13.284,-7.425 14.284,-6.425 20.318,-6.425 25.225,-11.332 v1(25.225,-11.95) v1@25,-11.95
  Bottom Layer w0.3: v1(25.225,-11.95) 27.095,-10.08 28.445,-10.08 32.328,-6.197 ; v1(25.95,50.025) 23.25,47.325 23.25,33.382 31.725,24.907 31.725,5.15 34.6,2.275 34.6,-5.47 33.895,-6.175 32.305,-6.175
USBTRANSMIT: R25.1 U1.65 | length 73.4
  Top Layer w0.3: U1.65@8.975,-5.925 12.663,-5.925 13.663,-4.925 18.578,-4.925 20.75,-2.753 20.75,-0.089 24.65,3.811 v1(24.65,4.1)
  Bottom Layer w0.3: v1(23.975,50.1) 22.25,48.375 22.25,33.675 29.6,26.325 29.6,9.875 24.65,4.925 v1(24.65,4.1)
VCAP1: C13.2 U1.49 | length 3.2
  Top Layer w0.3: v1(6.475,-11.475) 6.475,-12.525 6.925,-12.975 U1.49@6.925,-14.475
VCAP2: C14.2 U1.73 | length 3.5
  Top Layer w0.3: v1(6.575,-3.25) 6.575,-2.3 6.95,-1.925 U1.73@8.975,-1.925
VOLTAGE: R52.1 U1.30 | length 18.7
  Top Layer w0.3: U1.30@-2.575,-14.475 -2.575,-21.725 -4.2,-23.35 -4.2,-26.15 -2.475,-27.875 -0.95,-27.875 v1(0.6,-29.425) v1@0.6,-29.65
pads on no net: I1.0 I1.8 J1.4 PowerSwitch1.0 PowerSwitch1.3 TotalSwitch1.0 TotalSwitch1.3 U3.2

## Polygon pours and split planes (outlines as drawn)
GND on Bottom Layer "GND_L02_P008" (solid, remove dead copper, pour order 8): -37.3,59.35 36.975,59.5 68,16.5 67.675,-16.575 27.825,-59.575 -27.825,-59.575 -68.275,-16.45 -68.4,16.475 -36.7,59.6
GND on Top Layer "GND_L01_P010" (solid, remove dead copper, pour order 10): -36.975,59.5 36.975,59.5 67.8,16.6 67.8,-15.95 27.825,-59.575 -28,-59.5 -68,-16.5 -68.275,16.35 -36.8,59.725

## Keep-outs
Keep-Out Layer:
  the board outline again, w0.254

## Other copper
Top Layer:
  text "SC" at -34.9,58.15 h1
  text "S" at -32.4,58.15 h1
  text "P" at -30.4,58.15 h1
  text "A" at -28.4,58.15 h1
  text "C" at -26.4,58.15 h1
  text "R" at -24.4,58.15 h1
  text "T" at -22.4,58.15 h1
  text "T" at 23.6,58.15 h1
  text "R" at 25.6,58.15 h1
  text "3" at 27.6,58.15 h1
  text "5" at 29.6,58.15 h1
  text "B" at 31.6,58.15 h1
  text "I" at 33.6,58.15 h1
  text "U" at 35.6,58.15 h1

## Silkscreen, mask and mechanical layers (free items; w line width, h text height)
Top Solder:
  lines w2.5: -11.3,-45.025 -8.35,-42.075 3.925,-42.075 6.65,-44.8
Bottom Solder:
  lines w1.5: -65.573,-17.348 -66.25,4.55 -66.45,14.725 -46.719,42.588 -44.062,46.341 -36.477,57.052 -0.8,57.151 19.8,57.209 34.575,57.25 65.425,15.525 65.508,2.667 65.59,-10.201 65.625,-15.575 29.121,-55.269 ; -65.561,-17.36 -55.946,-27.394 -40.262,-43.763 -27.175,-56.85 -21.675,-56.85 -15.3,-50.475 ; -45.607,-30.095 -36.458,-30.095 -32.247,-25.884 ; -37.501,18.956 -46.262,27.716 -46.262,33.769 ; -37.225,46.467 -34.175,43.417 ; -15.3,-44.95 -15.3,-50.475 ; -4.788,-42.387 -2.575,-44.6 -2.575,-46.25 ; -1.525,35.867 2.875,40.267 6.25,40.267 ; 0.4,-38.383 0.4,-42.196 ; 6.275,40.242 1.85,35.817 -1.525,35.817 -3.95,35.817 -7.525,39.392 -7.525,53.547 ; 28.685,-55.742 27.003,-57.425 20.35,-57.425 13.4,-50.475 -15.3,-50.475 ; 29.825,-31.408 37.925,-39.508 ; 42.013,10.013 53.724,21.724 ; 57.125,-15.158 60.525,-15.158 62.075,-13.608 62.236,10.376 53.724,21.772 29.9,53.667 -7.525,53.547 ; 60.616,-15.173 54.328,-21.917 37.925,-39.508 ; -46.262,33.769 -60.875,13.117 -59.825,-15.558 -40.976,-34.83 -32.365,-43.633 -27.4,-43.633 -23.1,-39.333 -7.75,-39.333 -4.887,-42.196 0.4,-42.196 ; -46.262,33.769 -39.46,43.382 -37.225,46.54 -32.323,53.468 -7.525,53.547 ; 0.4,-42.196 2.437,-42.196 5.125,-39.508 37.925,-39.508

## Text inside footprints (layer, text, board x,y; h text height)
I1: Top Overlay "X" at 2.25,4.415 h1.52 r180; Top Overlay "Y" at -2.85,7.315 h1.52 r180